# EAGLE board STM32-PROX (EAGLE 6.5.0), part 1 of 2
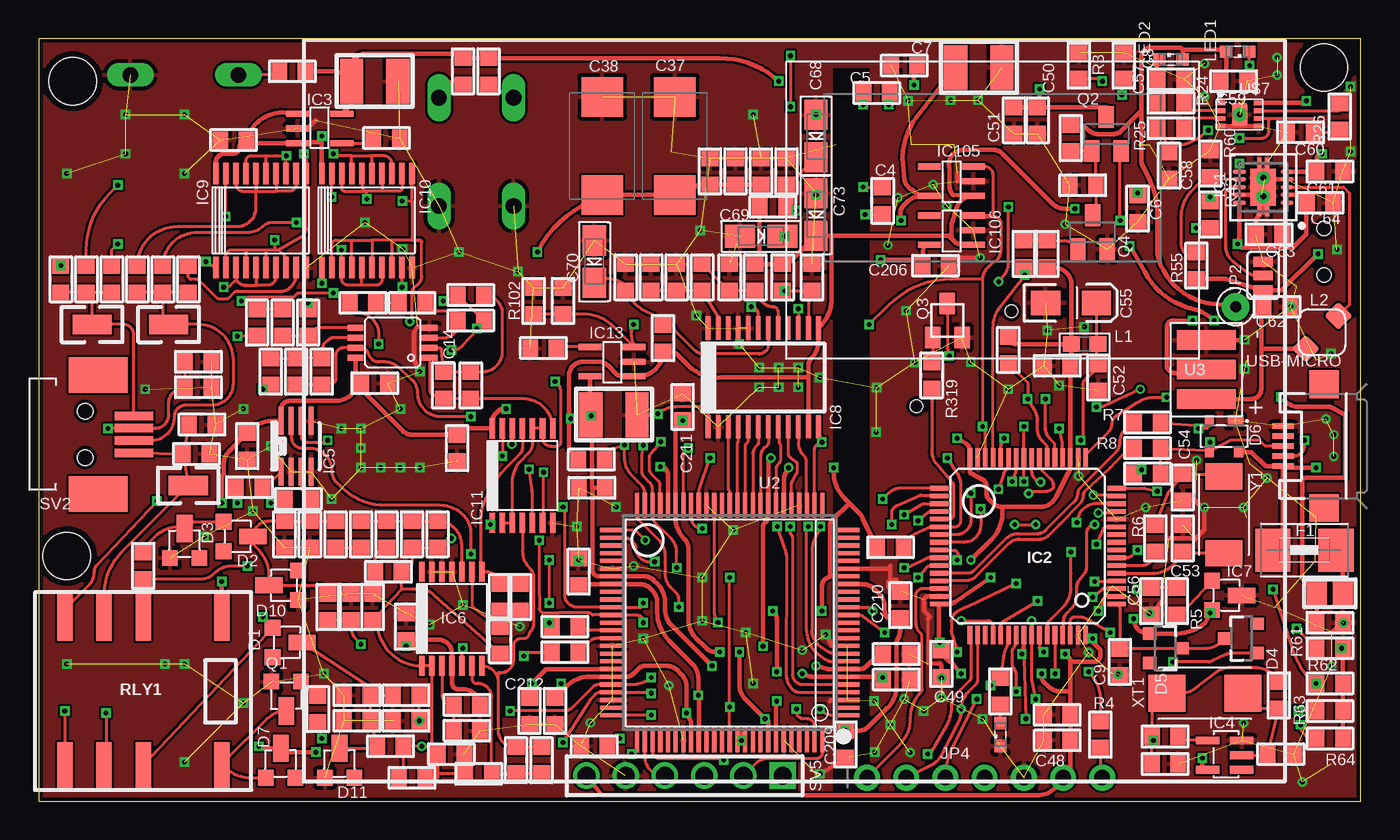
[diagram p0: board, top side]
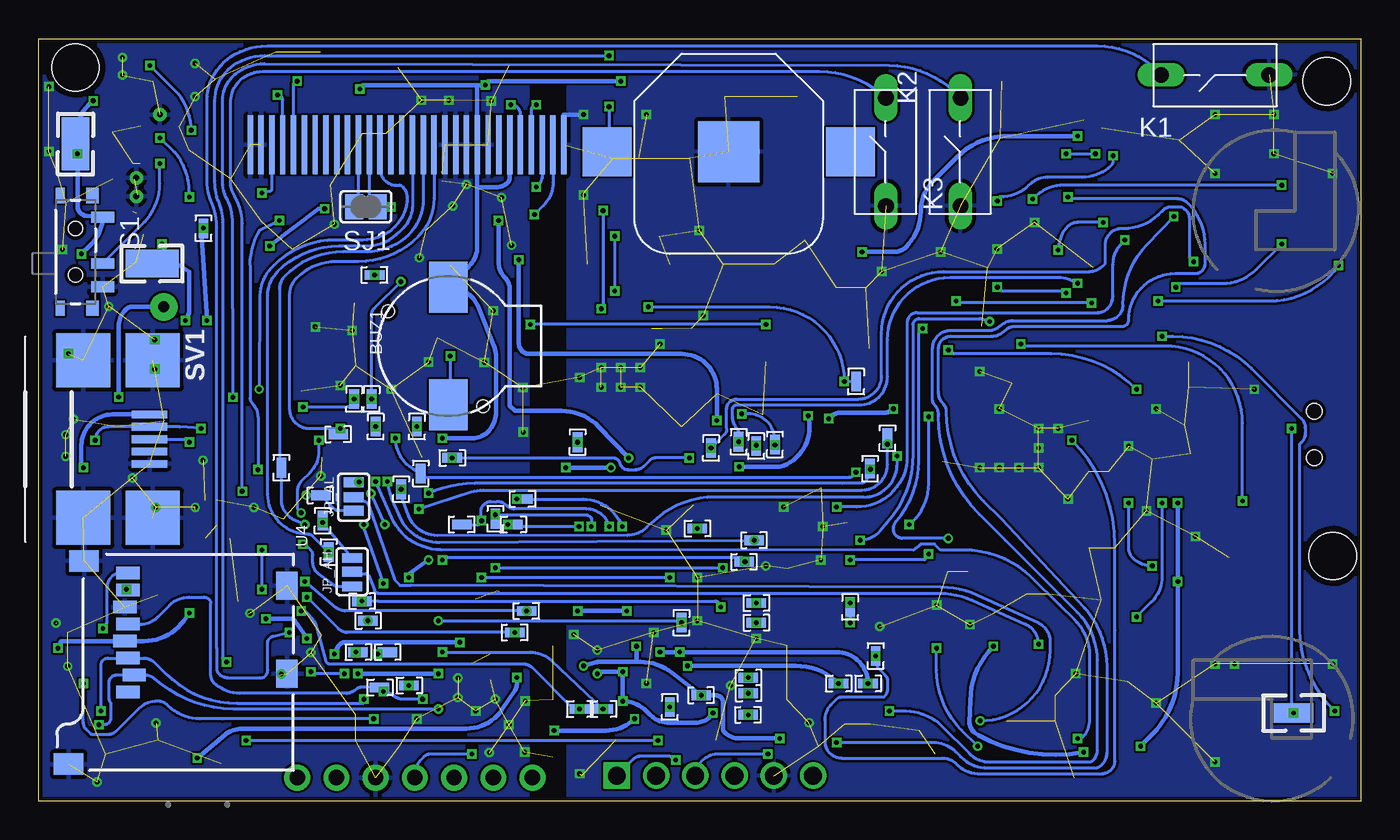
[diagram p1: board, bottom side, seen from below]

Size 85.62 x 49.37 mm. Coordinates in mm from the lower left corner, seen from the top.
Outline: 0,49.37 0,0 85.62,0 85.62,49.37 0,49.37
Copper layers (1*16): Top 0.035mm / dielectric 1.5mm / Bottom 0.035mm
Design rules "ITead_rule *": minimum track width 6mil, minimum drill 12mil, track to track 6mil, track to pad 6mil, pad to pad 6mil, via to via 6mil, smd to smd 0mil, copper to edge 10mil, drill to drill 10mil, minimum pad ring 10mil, minimum via ring 6mil, stop-mask expansion 2mil, vias tented up to drill 100mil, thermal gap 10mil
Net classes: 0 default: width 0.203 mm; 1 adc: width 0.203 mm; 2 power: width 0.279 mm, drill 0.254 mm

## Footprints (pad centres in the part's own frame; a part is rotated, then mirrored left to right if it is on the bottom)
SMD-TESTPOINT = smd 1.27 x 0.635: 1 0,0
NSL_SPARKFUN_BATTCON_12MM = smd 3.962 x 3.962: GND 0,0 | smd 3.175 x 3.175: PWR@1 -7.874,0; PWR@2 7.874,0
BUZZER = smd 3.3 x 2.5: 1 3.81,0; 2 -3.81,0 | hole 0.8: -3.897,-2.25; 2.25,3.897
RLC_0603 = smd 1 x 1.1: 1 -0.85,0; 2 0.85,0
RLC_1210 = smd 1.5 x 2.9: 1 -1.5,0; 2 1.5,0
D/7343-31R = smd 2.55 x 2.7: + 3.175,0; - -3.175,0
EIA3216-KIT = smd 1.9 x 1.6: A 1.65,0; C -1.65,0
EIA3216-18/A-R = smd 1.95 x 1.5: + 1.375,0; - -1.375,0
SOT23-3LEAD = smd 1.016 x 1.016: 1 -0.94,-0.762; 2 0.965,-0.762 | smd 1.016 x 1.778: 3 0.013,1.143
SOT23-3 = smd 0.8 x 0.9: 1 -0.95,-1; 2 0.95,-1; 3 0,1.1
USBUG_SOT143B = smd 1 x 0.7: 1 -0.75,-1 | smd 0.6 x 0.7: 2 0.95,-1; 3 0.95,1; 4 -0.95,1
1812 = smd 2.286 x 2.794: 1 -2.046,0; 2 2.046,0
RLC_0603@1 = smd 1 x 1.1: 1 -0.85,0; 2 0.85,0
QFN-10 = smd 0.28 x 0.85: 1 -1,-1.545; 2 -0.5,-1.545; 3 0,-1.545; 4 0.5,-1.545; 5 1,-1.545; 6 1,1.545; 7 0.5,1.545; 8 0,1.545; 9 -0.5,1.545; 10 -1,1.545 | smd 2.4 x 1.65: P0 0,0 | smd 0.7 x 0.28: P1 -1.55,-0.25; P2 1.55,-0.25; P3 1.55,0.25; P4 -1.55,0.25 | drill 0.381: V0 -0.6,0; V1 0.6,0
LQFP64A_PACKAGE = smd 1.2 x 0.3: 1 -5.75,3.75; 2 -5.75,3.25; 3 -5.75,2.75; 4 -5.75,2.25; 5 -5.75,1.75; 6 -5.75,1.25; 7 -5.75,0.75; 8 -5.75,0.25; 9 -5.75,-0.25; 10 -5.75,-0.75; 11 -5.75,-1.25; 12 -5.75,-1.75; 13 -5.75,-2.25; 14 -5.75,-2.75; 15 -5.75,-3.25; 16 -5.75,-3.75; 33 5.75,-3.75; 34 5.75,-3.25; 35 5.75,-2.75; 36 5.75,-2.25; 37 5.75,-1.75; 38 5.75,-1.25; 39 5.75,-0.75; 40 5.75,-0.25; 41 5.75,0.25; 42 5.75,0.75; 43 5.75,1.25; 44 5.75,1.75; 45 5.75,2.25; 46 5.75,2.75; 47 5.75,3.25; 48 5.75,3.75 | smd 0.3 x 1.2: 17 -3.75,-5.75; 18 -3.25,-5.75; 19 -2.75,-5.75; 20 -2.25,-5.75; 21 -1.75,-5.75; 22 -1.25,-5.75; 23 -0.75,-5.75; 24 -0.25,-5.75; 25 0.25,-5.75; 26 0.75,-5.75; 27 1.25,-5.75; 28 1.75,-5.75; 29 2.25,-5.75; 30 2.75,-5.75; 31 3.25,-5.75; 32 3.75,-5.75; 49 3.75,5.75; 50 3.25,5.75; 51 2.75,5.75; 52 2.25,5.75; 53 1.75,5.75; 54 1.25,5.75; 55 0.75,5.75; 56 0.25,5.75; 57 -0.25,5.75; 58 -0.75,5.75; 59 -1.25,5.75; 60 -1.75,5.75; 61 -2.25,5.75; 62 -2.75,5.75; 63 -3.25,5.75; 64 -3.75,5.75
SOT-23-5 = smd 0.4 x 1.5: 1 -0.94,-1.422; 2 0.01,-1.422; 3 0.96,-1.422; 4 0.96,1.428; 5 -0.94,1.428
SMV-5 = smd 1.5 x 0.5: 1 0,0; 2 0,-0.95; 3 0,-1.9; 4 2.2,-1.9; 5 2.2,0
SOT-23-8-OR-MSOP-8 = smd 0.325 x 1.8: 1 -0.975,-1.65; 2 -0.325,-1.65; 3 0.325,-1.65; 4 0.975,-1.65; 5 0.975,1.65; 6 0.325,1.65; 7 -0.325,1.65; 8 -0.975,1.65
TSSOP-14 = smd 1.3 x 0.36: 1 0,0; 2 0,-0.65; 3 0,-1.3; 4 0,-1.95; 5 0,-2.6; 6 0,-3.25; 7 0,-3.9; 8 6.095,-3.9; 9 6.095,-3.25; 10 6.095,-2.6; 11 6.095,-1.95; 12 6.095,-1.3; 13 6.095,-0.65; 14 6.095,0
TSSOP-24 = smd 0.3 x 1.5: 1 -2.925,-3.2; 2 -2.275,-3.2; 3 -1.625,-3.2; 4 -0.975,-3.2; 5 -0.325,-3.2; 6 0.325,-3.2; 7 0.975,-3.2; 8 1.625,-3.2; 9 2.275,-3.2; 10 2.925,-3.2; 11 3.575,-3.2; 12 4.225,-3.2; 13 4.225,3.2; 14 3.575,3.2; 15 2.925,3.2; 16 2.275,3.2; 17 1.625,3.2; 18 0.975,3.2; 19 0.325,3.2; 20 -0.325,3.2; 21 -0.975,3.2; 22 -1.625,3.2; 23 -2.275,3.2; 24 -2.925,3.2
TSSOP-20 = smd 1.4 x 0.36: 1 0,0; 2 0,-0.65; 3 0,-1.3; 4 0,-1.95; 5 0,-2.6; 6 0,-3.25; 7 0,-3.9; 8 0,-4.55; 9 0,-5.2; 10 0,-5.85; 11 6.095,-5.85; 12 6.095,-5.2; 13 6.095,-4.55; 14 6.095,-3.9; 15 6.095,-3.25; 16 6.095,-2.6; 17 6.095,-1.95; 18 6.095,-1.3; 19 6.095,-0.65; 20 6.095,0
MSOP8 = smd 0.41 x 1.02: 1 0,0; 2 0.65,0; 3 1.3,0; 4 1.95,0; 5 1.95,4.8; 6 1.3,4.8; 7 0.65,4.8; 8 0,4.8
SJ_3 = smd 0.635 x 1.27: 1 -0.889,0; 2 0,0; 3 0.965,0
1X07_ROUND = drill 1 pad 1.676: 1 -7.62,0; 2 -5.08,0; 3 -2.54,0; 4 0,0; 5 2.54,0; 6 5.08,0; 7 7.62,0
B3F-5XX = drill 1.016 long: 1 -3.501,-0.029; 2 3.501,-0.029
0603 = smd 1.1 x 1: 1 -0.85,0; 2 0.85,0
CDRH2D18 = smd 1.3 x 1.3 rotated 225: P$1 -1.061,1.061 | smd 1.3 x 1.3 rotated 315: P$2 1.061,-1.061
LED_SML0603 = smd 0.8 x 0.8: A 0.75,0; C -0.75,0
SOT23-BEC = smd 1 x 1.4: B -0.95,-1.1; C 0,1.1; E 0.95,-1.1
SOT-23-3 = smd 1 x 1.4: 1 -0.95,-1.1; 2 0.95,-1.1; 3 0,1.1
G6S-2F = smd 1 x 3: 1 -5.08,-4.78; 3 0,-4.78; 4 2.54,-4.78; 5 5.08,-4.78; 8 5.08,4.78; 9 2.54,4.78; 10 0,4.78; 12 -5.08,4.78
SWITCH-SPST-SMD-A = smd 0.7 x 1.5: 1 -2.25,-1.75; 2 -0.75,-1.75; 3 2.25,-1.75 | smd 1 x 0.6: GND1 -3.65,1; GND3 3.65,1 | smd 1 x 0.8: GND2 -3.65,-1.1; GND4 3.65,-1.1 | hole 0.9: -1.5,0; 1.5,0
SOLDERJUMPER_REFLOW = smd 1.168 x 1.6: 1 -0.762,0; 2 0.762,0
USB-MINIB-SMD = smd 2.3 x 0.5: 1 2,0.4; 2 2,-0.4; 3 2,-1.2; 4 2,-2; 5 2,-2.8 | smd 3.5 x 3.5: TAB0 -2.3,3.9; TAB1 2.2,3.9; TAB2 2.2,-6.3; TAB3 -2.3,-6.3
HIROSE-MQ172-4POS = smd 0.55 x 2.5: 1 -1.2,6.75; 2 -0.4,6.75; 3 0.4,6.75; 4 1.2,6.75 | smd 2.3 x 3.8: P$1 -3.85,4.45; P$2 3.85,4.45 | hole 1: -1.5,3.6; 1.5,3.6
HEADER-MALE-6X1-0.100-UNKEYED = drill 1.143 square: 1 0,6.35 | drill 1.143: 2 0,3.81; 3 0,1.27; 4 0,-1.27; 5 0,-3.81; 6 0,-6.35
KEYSTONE-SMD-TESTPOINT-5015 = smd 2.54 x 1.27: 1 0,0
TESTPAD-PTH-0.7MM = drill 0.7 pad 1.778: 1 0,0
--MERGED_KEYSTONE-SMD-TESTPOINT-5015 = smd 3.429 x 1.778: 1 0,0
RLC_0805 = smd 1.3 x 1.5: 1 -0.85,0; 2 0.85,0
VQ100 = smd 0.27 x 1.6: 1 -6,-7.6; 2 -5.5,-7.6; 3 -5,-7.6; 4 -4.5,-7.6; 5 -4,-7.6; 6 -3.5,-7.6; 7 -3,-7.6; 8 -2.5,-7.6; 9 -2,-7.6; 10 -1.5,-7.6; 11 -1,-7.6; 12 -0.5,-7.6; 13 0,-7.6; 14 0.5,-7.6; 15 1,-7.6; 16 1.5,-7.6; 17 2,-7.6; 18 2.5,-7.6; 19 3,-7.6; 20 3.5,-7.6; 21 4,-7.6; 22 4.5,-7.6; 23 5,-7.6; 24 5.5,-7.6; 25 6,-7.6; 51 6,7.6; 52 5.5,7.6; 53 5,7.6; 54 4.5,7.6; 55 4,7.6; 56 3.5,7.6; 57 3,7.6; 58 2.5,7.6; 59 2,7.6; 60 1.5,7.6; 61 1,7.6; 62 0.5,7.6; 63 0,7.6; 64 -0.5,7.6; 65 -1,7.6; 66 -1.5,7.6; 67 -2,7.6; 68 -2.5,7.6; 69 -3,7.6; 70 -3.5,7.6; 71 -4,7.6; 72 -4.5,7.6; 73 -5,7.6; 74 -5.5,7.6; 75 -6,7.6 | smd 1.6 x 0.27: 26 7.6,-6; 27 7.6,-5.5; 28 7.6,-5; 29 7.6,-4.5; 30 7.6,-4; 31 7.6,-3.5; 32 7.6,-3; 33 7.6,-2.5; 34 7.6,-2; 35 7.6,-1.5; 36 7.6,-1; 37 7.6,-0.5; 38 7.6,0; 39 7.6,0.5; 40 7.6,1; 41 7.6,1.5; 42 7.6,2; 43 7.6,2.5; 44 7.6,3; 45 7.6,3.5; 46 7.6,4; 47 7.6,4.5; 48 7.6,5; 49 7.6,5.5; 50 7.6,6; 76 -7.6,6; 77 -7.6,5.5; 78 -7.6,5; 79 -7.6,4.5; 80 -7.6,4; 81 -7.6,3.5; 82 -7.6,3; 83 -7.6,2.5; 84 -7.6,2; 85 -7.6,1.5; 86 -7.6,1; 87 -7.6,0.5; 88 -7.6,0; 89 -7.6,-0.5; 90 -7.6,-1; 91 -7.6,-1.5; 92 -7.6,-2; 93 -7.6,-2.5; 94 -7.6,-3; 95 -7.6,-3.5; 96 -7.6,-4; 97 -7.6,-4.5; 98 -7.6,-5; 99 -7.6,-5.5; 100 -7.6,-6
MICROBUILDER_UG-2864HSWEG01_0.96IN_WRAPAROUND = smd 0.35 x 3.81 bottom: 1 -10.15,8.96; 2 -9.45,8.96; 3 -8.75,8.96; 4 -8.05,8.96; 5 -7.35,8.96; 6 -6.65,8.96; 7 -5.95,8.96; 8 -5.25,8.96; 9 -4.55,8.96; 10 -3.85,8.96; 11 -3.15,8.96; 12 -2.45,8.96; 13 -1.75,8.96; 14 -1.05,8.96; 15 -0.35,8.96; 16 0.35,8.96; 17 1.05,8.96; 18 1.75,8.96; 19 2.45,8.96; 20 3.15,8.96; 21 3.85,8.96; 22 4.55,8.96; 23 5.25,8.96; 24 5.95,8.96; 25 6.65,8.96; 26 7.35,8.96; 27 8.05,8.96; 28 8.75,8.96; 29 9.45,8.96; 30 10.15,8.96
MICRO-SD-SOCKET-PP = smd 0.8 x 1.5: 1 -8.94,10.7; 2 -7.84,10.3; 3 -6.74,10.7; 4 -5.64,10.9; 5 -4.54,10.7; 6 -3.44,10.9; 7 -2.34,10.7; 8 -1.24,10.7 | smd 1.8 x 1.4: CD1 -2.05,0.4; CD2 -7.75,0.4 | smd 1.4 x 1.9: GND1 -13.6,14.55; GND3 -0.45,13.55
STAND-OFF-TIGHT = hole 3.048: 0,0
UDFN-EP = smd 0.3 x 0.65: 1 -0.75,-1.25; 2 -0.25,-1.25; 3 0.25,-1.25; 4 0.75,-1.25; 5 0.75,1.25; 6 0.25,1.25; 7 -0.25,1.25; 8 -0.75,1.25 | smd 1.45 x 1.05: 9 0,0 | drill 0.356: V1 0,0
BATT = smd 1.27 x 3.81: 1 -1.905,0; 2 0,0; 3 1.905,0
USB-MICROB = smd 0.35 x 1.4: D+ 0,2.65; D- -0.65,2.65; GND 1.3,2.65; ID 0.65,2.65; VBUS -1.3,2.65 | smd 1.8 x 1.9: MT1 -4,0; MT2 4,0
XTAL-SMD-CITIZEN-CS10 = smd 2.4 x 2.4: A -0.2,0; B 4.7,0
CRYSTAL-TXC-7A = smd 1.7 x 2.4: P$1 2.485,0; P$2 -2.485,0

## Placement (x,y rotation side)
ADC_CLK_TP  TESTPAD  [SMD-TESTPOINT]  50.72,23.24 90 bottom
ADC_NOE_TP  TESTPAD  [SMD-TESTPOINT]  37.95,23.1 90 bottom
BAT1  3V  [NSL_SPARKFUN_BATTCON_12MM]  40.94,42.04 0 bottom
BUZ1  BUZZER  [BUZZER]  59.1,29.46 90 bottom
C1  33nF  [RLC_0603]  83.61,11.56 0 top
C2  22pF  [RLC_0603]  80.44,3.05 0 top
C3  22pF  [RLC_0603]  72.94,2.41 0 top
C4  1uF  [RLC_0603]  54.66,38.86 90 top
C5  1uF  [RLC_0603]  54.28,45.85 0 top
C6  4.7uF  [RLC_0603]  71.17,38.35 270 top
C7  4.7uF  [RLC_0603]  56.05,47.62 180 top
C8  4.7uF  [RLC_0603]  70.28,47.62 90 top
C9  100nF  [RLC_0603]  70.02,9.02 90 top
C10  100nF  [RLC_0603]  26.72,3.05 0 top
C11  1nF  [RLC_0603]  20.62,6.86 180 top
C12  1nF  [RLC_0603]  22.78,3.56 0 top
C13  dnp  [RLC_0603]  32.56,2.67 90 top
C14  22pF  [RLC_0603]  6.78,15.24 90 top
C15  130pF  [RLC_0603]  15.92,17.27 270 top
C16  1nF  [RLC_0603]  20.88,17.27 90 top
C17  dnp  [RLC_0603]  31.16,13.21 90 top
C18  33nF  [RLC_0603]  41.32,33.91 90 top
C19  33nF  [RLC_0603]  44.75,33.91 90 top
C20  dnp  [RLC_0603]  10.33,28.45 0 top
C21  33nF  [RLC_0603]  23.8,11.3 90 top
C22  33nF  [RLC_0603]  21.76,27.05 0 top
C23  33nF  [RLC_0603]  13.51,22.99 270 top
C24  33nF  [RLC_0603]  27.1,22.86 270 top
C25  33nF  [RLC_0603]  65.96,5.59 180 top
C26  33nF  [RLC_0603]  65.96,28.19 180 top
C27  4.7uF  [RLC_1210]  21.76,46.61 0 top
C28  33nF  [RLC_0603]  33.45,5.84 270 top
C29  33nF  [RLC_0603]  34.97,14.86 90 top
C30  33nF  [RLC_0603]  35.99,3.56 180 top
C31  33nF  [RLC_0603]  55.55,9.53 0 top
C32  33nF  [RLC_0603]  55.55,7.87 0 top
C33  4.7uF  [RLC_1210]  60.88,47.5 0 top
C34  4.7uF  [RLC_1210]  37.26,25.02 0 top
C35  47pF  [RLC_0603]  10.59,24.38 0 top
C36  dnp  [RLC_0603]  10.21,22.48 0 top
C37  100uF  [D/7343-31R]  41.19,42.42 270 top
C38  100uF  [D/7343-31R]  36.5,42.42 270 top
C39  1nF  [RLC_0603]  10.33,26.8 0 top
C40  dnp  [RLC_0603]  27.99,26.92 270 top
C41  dnp  [RLC_0603]  18.34,27.81 270 top
C42  1nF  [RLC_0603]  21,32.26 0 top
C43  1nF  [RLC_0603]  14.14,30.99 90 top
C44  33nF  [RLC_0603]  45.13,40.77 90 top
C45  100nF  [RLC_0603]  21.64,12.57 90 top
C46  33nF  [RLC_0603]  12.62,42.8 180 top
C47  33nF  [RLC_0603]  35.82,20.3 180 top
C48  100nF  [RLC_0603]  65.96,3.94 180 top
C49  100nF  [RLC_0603]  58.47,8.89 270 top
C50  100nF  [RLC_0603]  64.69,44.07 270 top
C51  100nF  [RLC_0603]  63.17,44.07 270 top
C52  100nF  [RLC_0603]  68.63,27.43 270 top
C53  12pF  [RLC_0603]  74.09,17.02 270 top
C54  12pF  [RLC_0603]  74.09,20.32 90 top
C55  10uF  [EIA3216-KIT]  66.85,32.26 0 top
C56  100nF  [RLC_0603]  72.06,12.95 270 top
C57  100nF  [RLC_0603]  73.33,46.74 0 top
C58  100nF  [RLC_0603]  73.2,41.15 270 top
C59  1uF  [RLC_0603]  77.39,46.61 0 top
C60  100nF  [RLC_0603]  81.71,43.31 180 top
C61  1uF  [RLC_0603]  83.61,40.77 0 top
C62  10uF  [RLC_0603]  80.18,32 0 top
C63  100nF  [RLC_0603]  79.68,36.7 180 top
C64  10uF  [RLC_0603]  82.98,38.73 0 top
C65  100nF  [RLC_0603]  38.02,33.91 90 top
C66  100nF  [RLC_0603]  48.43,40.77 90 top
C67  100nF  [RLC_0603]  50.08,33.91 90 top
C68  4.7uF  [EIA3216-18/A-R]  50.34,43.05 270 top
C69  4.7uF  [EIA3216-18/A-R]  46.78,36.58 0 top
C70  4.7uF  [EIA3216-18/A-R]  35.99,34.92 270 top
C71  100nF  [RLC_0603]  43.48,40.77 90 top
C72  100nF  [RLC_0603]  46.78,40.77 90 top
C73  4.7uF  [EIA3216-18/A-R]  50.34,37.97 270 top
C74  10nF  [RLC_0603]  22.53,42.93 0 top
C75  10nF  [RLC_0603]  32.69,29.34 180 top
C206  4.7uF  [RLC_0603]  58.09,34.67 0 top
C209  100nF  [RLC_0603]  52.24,3.68 270 top
C210  100nF  [RLC_0603]  55.8,12.7 90 top
C211  100nF  [RLC_0603]  41.7,25.53 90 top
C212  100nF  [RLC_0603]  31.8,5.84 270 top
CROSS_HI_TP  TESTPAD  [SMD-TESTPOINT]  31.42,9.4 90 bottom
CROSS_LO_TP  TESTPAD  [SMD-TESTPOINT]  33.07,12.57 270 bottom
D1  DIODE-SMD-SOT23  [SOT23-3LEAD]  15.92,10.29 270 top
D2  DIODE-SMD-SOT23  [SOT23-3LEAD]  12.75,17.14 270 top
D3  DIODE-SMD-SOT23  [SOT23-3LEAD]  9.45,16.51 0 top
D4  PMEG4005ET  [SOT23-3]  77.9,10.54 90 top
D5  PMEG4005ET  [SOT23-3]  72.94,9.91 270 top
D6  USBUG_PRTR5V0U2X  [USBUG_SOT143B]  76.75,23.62 180 top
D7  DIODE-SMD-SOT23  [SOT23-3LEAD]  15.67,2.29 0 top
D10  DIODE-SMD-SOT23  [SOT23-3LEAD]  16.05,13.97 90 top
D11  DIODE-SMD-SOT23  [SOT23-3LEAD]  19.48,2.29 0 top
DBG_TP  TESTPAD  [SMD-TESTPOINT]  39.67,5.59 180 bottom
F1  [1812]  81.96,16.26 180 top
FB1  FERRITERLC_0603  [RLC_0603@1]  40.43,29.97 270 top
FB2\  FERRITERLC_0603  [RLC_0603@1]  48.18,33.91 90 top
FB3  FERRITERLC_0603  [RLC_0603@1]  47.54,38.48 180 top
FPGA_DOUT_TP  TESTPAD  [SMD-TESTPOINT]  43.99,11.56 270 bottom
FPGA_NINIT_TP  TESTPAD  [SMD-TESTPOINT]  58.85,22.23 0 bottom
FPGA_NINIT_TP1  TESTPAD  [SMD-TESTPOINT]  31.78,21.53 90 bottom
FPGA_NINIT_TP2  TESTPAD  [SMD-TESTPOINT]  30.65,23.5 90 bottom
IC1  [QFN-10]  79.3,39.75 90 top
IC2  STM32F1_HIGH_DENSITY_LQFP64LQFP64(10X10)  [LQFP64A_PACKAGE]  64.05,16.51 180 top
IC3  PQ1X331M2ZP-3V3-LDO-SOT-23-5  [SOT-23-5]  18.21,43.56 270 top
IC4  HCU-INVERTER  [SMV-5]  77.9,2.03 180 top
IC5  TLV3502  [SOT-23-8-OR-MSOP-8]  16.68,22.99 0 top
IC6  MCP6294  [TSSOP-14]  24.81,8.76 90 top
IC7  MCP100  [SOT23-3LEAD]  76.75,13.34 270 top
IC8  TLC5540  [TSSOP-24]  46.27,27.43 0 top
IC9  74XX244  [TSSOP-20]  11.48,34.54 90 top
IC10  74XX244  [TSSOP-20]  18.34,34.54 90 top
IC11  CD4066  [TSSOP-14]  29.38,18.03 90 top
IC13  PQ1X331M2ZP-3V3-LDO-SOT-23-5  [SOT-23-5]  37.13,28.45 90 top
IC14  AD8052  [MSOP8]  25.32,28.7 90 top
IC105  MCP1824T-250  [SOT-23-5]  59.1,40.13 90 top
IC106  MCP1824T-120  [SOT-23-5]  59.1,36.96 90 top
JP2  JUMPER-3SMD  [SJ_3]  79.3,34.04 270 top
JP4  [1X07_ROUND]  61.26,1.52 0 top
JP_AH  [SJ_3]  65.33,14.86 270 bottom
JP_AL  [SJ_3]  65.22,19.68 90 bottom
K1  [B3F-5XX]  9.45,46.99 180 bottom
K2  [B3F-5XX]  25.96,42.04 90 bottom
K3  [B3F-5XX]  30.78,42.04 90 bottom
L1  100Ohm  [0603]  67.74,29.59 0 top
L2  CDRH2D18/HPNP-2R2NC  [CDRH2D18]  83.1,30.35 90 top
LED1  [LED_SML0603]  77.64,48.51 180 top
LED2  [LED_SML0603]  73.33,48.01 0 top
LED3  [LED_SML0603]  62.28,4.32 90 top
LED_A_TP  TESTPAD  [SMD-TESTPOINT]  61.64,7.49 0 bottom
MISO_TP  TESTPAD  [SMD-TESTPOINT]  54.02,12.32 180 bottom
MOSI_TP  TESTPAD  [SMD-TESTPOINT]  54.78,10.92 180 bottom
NCS_TP  TESTPAD  [SMD-TESTPOINT]  64.69,12.95 0 bottom
OE1_TP  TESTPAD  [SMD-TESTPOINT]  42.08,22.86 270 bottom
OE2_TP  TESTPAD  [SMD-TESTPOINT]  40.29,23.27 270 bottom
OE3_TP  TESTPAD  [SMD-TESTPOINT]  39.67,8 0 bottom
OE4_TP  TESTPAD  [SMD-TESTPOINT]  39.67,6.99 0 bottom
PCK0_TP  TESTPAD  [SMD-TESTPOINT]  44.75,6.1 270 bottom
PWR_HI_TP  TESTPAD  [SMD-TESTPOINT]  39.16,12.83 0 bottom
PWR_LO_TP  TESTPAD  [SMD-TESTPOINT]  39.16,11.56 0 bottom
Q1  NPN-SOT23-2N3904  [SOT23-3LEAD]  16.05,6.99 180 top
Q2  BC817-16SMD  [SOT23-BEC]  69.13,43.18 0 top
Q3  MMBT2222  [SOT-23-3]  58.85,31.11 0 top
Q4  BC817-16SMD  [SOT23-BEC]  68.25,36.83 0 top
R1  1M  [RLC_0603@1]  80.31,6.86 90 top
R2  100  [RLC_0603@1]  72.94,4.19 180 top
R3  820K  [RLC_0603@1]  67.36,47.62 270 top
R4  10K  [RLC_0603@1]  68.75,4.32 90 top
R5  10K  [RLC_0603@1]  73.71,12.95 90 top
R6  390  [RLC_0603@1]  72.31,17.02 270 top
R7  27  [RLC_0603@1]  71.8,24.51 180 top
R8  27  [RLC_0603@1]  71.8,22.86 180 top
R9  100K  [RLC_0603@1]  27.73,6.22 0 top
R10  100K  [RLC_0603@1]  27.73,4.57 180 top
R11  510K  [RLC_0603@1]  20.62,5.21 0 top
R12  100K  [RLC_0603@1]  24.18,1.52 180 top
R13  10K  [RLC_0603@1]  28.5,1.78 0 top
R14  10K  [RLC_0603@1]  30.91,2.67 90 top
R15  10K  [RLC_0603@1]  17.57,17.27 90 top
R16  zerohm  [RLC_0603@1]  19.22,17.27 270 top
R17  10K  [RLC_0603@1]  24.18,17.27 90 top
R18  10K  [RLC_0603@1]  29.89,13.21 90 top
R19  10K  [RLC_0603@1]  29.89,10.41 90 top
R20  240K  [RLC_0603@1]  13.64,20.32 0 top
R21  24K  [RLC_0603@1]  16.81,19.56 0 top
R22  33  [RLC_0603@1]  4.75,33.78 270 top
R23  1K  [RLC_0603@1]  33.96,32.38 270 top
R24  [RLC_0603@1]  73.33,45.21 0 top
R25  [RLC_0603@1]  73.33,43.56 0 top
R26  215.9K  [RLC_0603@1]  84.25,44.32 270 top
R27  33  [RLC_0603@1]  6.4,33.78 270 top
R28  33  [RLC_0603@1]  3.1,33.78 270 top
R29  33  [RLC_0603@1]  8.05,33.78 270 top
R30  10M  [RLC_0603@1]  23.8,6.86 0 top
R31  240K  [RLC_0603@1]  23.8,5.21 0 top
R32  zerohm  [RLC_0603@1]  15.8,30.99 270 top
R33  2.4K  [RLC_0603@1]  26.21,26.92 270 top
R34  10K  [RLC_0603@1]  16.68,27.81 270 top
R35  zerohm  [RLC_0603@1]  24.18,32.26 0 top
R36  dnp  [RLC_0603@1]  25.83,17.27 90 top
R37  dnp  [RLC_0603@1]  22.53,17.27 90 top
R38  dnp  [RLC_0603@1]  22.65,14.86 180 top
R39  1K  [RLC_0603@1]  34.08,11.3 0 top
R40  10K  [RLC_0603@1]  18.08,5.97 90 top
R41  10M  [RLC_0603@1]  18.72,12.57 270 top
R42  1M  [RLC_0603@1]  20.24,12.57 270 top
R43  74.74K  [RLC_0603@1]  75.87,37.97 90 top
R44  1K  [RLC_0603@1]  34.08,9.65 0 top
R45  10K  [RLC_0603@1]  9.7,33.78 270 top
R46  10K  [RLC_0603@1]  1.44,33.78 270 top
R47  10K  [RLC_0603@1]  35.8,22.12 0 top
R48  dnp  [RLC_0603@1]  17.45,30.99 270 top
R49  2.4K  [RLC_0603@1]  27.99,31.11 180 top
R50  10K  [RLC_0603@1]  15.03,27.81 90 top
R51  2.4K  [RLC_0603@1]  27.99,32.77 0 top
R52  100  [RLC_0603@1]  46.4,33.91 90 top
R53  330  [RLC_0603@1]  42.97,33.91 90 top
R54  100  [RLC_0603@1]  39.67,33.91 270 top
R55  1.5M  [RLC_0603@1]  74.98,34.67 270 top
R56  10K  [RLC_0603@1]  66.85,42.93 270 top
R57  10K  [RLC_0603@1]  65.33,35.43 90 top
R58  10K  [RLC_0603@1]  63.8,35.43 90 top
R59  3.3K  [RLC_0603@1]  55.16,16.43 180 top
R60  150K 1%  [RLC_0603@1]  75.87,41.27 270 top
R61  10K  [RLC_0603@1]  83.61,9.91 0 top
R62  10K  [RLC_0603@1]  83.61,7.62 0 top
R63  10K  [RLC_0603@1]  83.61,5.84 0 top
R64  10K  [RLC_0603@1]  83.61,4.06 0 top
R65  330  [RLC_0603@1]  62.28,7.11 270 top
R66  10K  [RLC_0603@1]  62.78,29.21 90 top
R67  10K  [RLC_0603@1]  67.61,39.88 0 top
R68  10K  [RLC_0603@1]  71.8,21.21 180 top
R69  10K  [RLC_0603@1]  29.13,47.24 90 top
R70  10K  [RLC_0603@1]  27.48,47.24 90 top
R71  10K  [RLC_0603@1]  16.43,47.24 0 top
R102  10K  [RLC_0603@1]  32.05,32.38 90 top
R319  100  [RLC_0603@1]  57.83,27.56 270 top
RELAY_ON_TP  TESTPAD  [SMD-TESTPOINT]  63.8,24.26 270 bottom
RLY1  G6S-2H  [G6S-2F]  6.78,7.11 180 top
S1  [SWITCH-SPST-SMD-A]  83.23,35.56 90 bottom
SJ1  [SOLDERJUMPER_REFLOW]  64.44,38.48 180 bottom
SPARE_FPGA_TP  TESTPAD  [SMD-TESTPOINT]  42.97,17.65 0 bottom
SPCK_TP  TESTPAD  [SMD-TESTPOINT]  50.59,5.97 0 bottom
SV1  USB-MINIB  [USB-MINIB-SMD]  80.44,24.64 0 bottom
SV2  HIROSE-MQ172-4POS  [HIROSE-MQ172-4POS]  -0.59,23.75 270 top
SV5  HEADER-MALE-6X1  [HEADER-MALE-6X1-0.100-UNKEYED]  41.83,1.65 270 top
TP1  TESTPAD  [SMD-TESTPOINT]  32.69,27.18 270 bottom
TP2  TESTPADKEYSTONE-SMD  [KEYSTONE-SMD-TESTPOINT-5015]  4.37,5.71 0 bottom
TP3  TESTPADKEYSTONE-SMD  [KEYSTONE-SMD-TESTPOINT-5015]  9.7,20.45 180 top
TP4  TESTPADKEYSTONE-SMD  [KEYSTONE-SMD-TESTPOINT-5015]  8.43,30.86 180 top
TP5  TESTPADKEYSTONE-SMD  [KEYSTONE-SMD-TESTPOINT-5015]  3.48,30.86 180 top
TP6  TESTPAD  [SMD-TESTPOINT]  63.55,7.37 0 bottom
TP8  TESTPAD0.7MM-ROUND-DRILLED  [TESTPAD-PTH-0.7MM]  77.52,32 180 top
TP9  TESTPADKEYSTONE-SMD  [--MERGED_KEYSTONE-SMD-TESTPOINT-5015]  83.23,42.55 90 bottom
TP10  TESTPADKEYSTONE-SMD  [--MERGED_KEYSTONE-SMD-TESTPOINT-5015]  78.28,34.8 180 bottom
TP11  TESTPAD  [SMD-TESTPOINT]  63.04,9.65 0 bottom
TP16  TESTPAD  [SMD-TESTPOINT]  74.95,37.08 90 bottom
TP18  TESTPAD  [SMD-TESTPOINT]  33.83,7.62 0 bottom
TP19  TESTPAD  [SMD-TESTPOINT]  42.72,6.86 180 bottom
TP20  TESTPAD  [SMD-TESTPOINT]  31.92,7.62 0 bottom
TP22  TESTPAD  [SMD-TESTPOINT]  61.13,24.26 270 bottom
TP23  TESTPAD  [SMD-TESTPOINT]  63.87,34.06 180 bottom
TP24  TESTPAD  [SMD-TESTPOINT]  49.07,5.97 0 bottom
TP25  TESTPAD  [SMD-TESTPOINT]  39.92,15.49 180 bottom
TP26  TESTPAD  [SMD-TESTPOINT]  39.16,23 270 bottom
TP28  TESTPAD  [SMD-TESTPOINT]  66.21,23.75 180 bottom
TP29  TESTPAD  [SMD-TESTPOINT]  69.9,21.59 90 bottom
TP30  TESTPAD  [SMD-TESTPOINT]  66.85,16.13 90 bottom
TP31  TESTPAD  [SMD-TESTPOINT]  64.94,9.65 0 bottom
TP32  TESTPAD  [SMD-TESTPOINT]  64.31,11.68 0 bottom
TP33  TESTPAD  [SMD-TESTPOINT]  60.88,21.21 90 bottom
TP34  TESTPAD  [SMD-TESTPOINT]  62.15,20.19 90 bottom
TP35  TESTPAD  [SMD-TESTPOINT]  39.29,16.89 180 bottom
TP48  TESTPAD  [SMD-TESTPOINT]  58.21,17.91 180 bottom
TP49  TESTPAD  [SMD-TESTPOINT]  56.05,18.29 90 bottom
TP50  TESTPAD  [SMD-TESTPOINT]  54.91,17.91 0 bottom
TP51  TESTPAD  [SMD-TESTPOINT]  54.28,19.56 180 bottom
TP52  TESTPAD  [SMD-TESTPOINT]  67.23,18.16 90 bottom
TP53  TESTPAD  [SMD-TESTPOINT]  67.36,19.81 180 bottom
TP54  TESTPAD  [SMD-TESTPOINT]  65.2,26.04 270 bottom
TP55  TESTPAD  [SMD-TESTPOINT]  64.05,26.04 270 bottom
U1  FERRITE0805  [RLC_0805]  83.61,13.46 180 top
U2  XC3S50  [VQ100]  44.75,11.56 90 top
U3  UG-2864HSWEG01  [MICROBUILDER_UG-2864HSWEG01_0.96IN_WRAPAROUND]  61.77,33.53 0 top
U4  SDCARD  [MICRO-SD-SOCKET-PP]  69.13,16 90 bottom
U$1  [STAND-OFF-TIGHT]  1.83,15.88 0 top
U$2  [STAND-OFF-TIGHT]  2.21,46.61 0 top
U$4  [STAND-OFF-TIGHT]  83.23,47.5 0 top
U$7  MC34674  [UDFN-EP]  77.77,44.45 270 top
U$9  BATT  [BATT]  75.61,27.94 270 top
U$12  [L1LOGO]  5.51,38.23 0 top
U$13  [L1LOGO]  5.76,5.33 270 top
USB-MICRO  USB-MICROB  [USB-MICROB]  83.23,22.99 90 top
XT1  XTAL-SMD-CITIZEN-CS10  [XTAL-SMD-CITIZEN-CS10]  77.77,6.99 180 top
Y1  8Mhz  [CRYSTAL-TXC-7A]  76.75,18.54 270 top

## Library data of the parts
ADC_CLK_TP ADC_NOE_TP C13 C17 C20 C36 C40 C41 CROSS_HI_TP CROSS_LO_TP D10 D11 DBG_TP L2 OE1_TP OE2_TP OE3_TP OE4_TP PCK0_TP PWR_HI_TP PWR_LO_TP R16 R24 R25 R32 R35-R38 R48 SPARE_FPGA_TP SV1 SV5 TP1-TP5 U3 U4 = STM32-PROX; OC_NEWARK: unknown; PARTNO: *
BAT1 = STM32-PROX; DIGIKEY: BK-885CT-ND; MPN: BK-885-TR; OC_NEWARK: unknown; PARTNO: BK-885-TR
BUZ1 = STM32-PROX; DIGIKEY: 102-1265-1-ND; MF: CCV-084B16; MPN: CCV-084B16; OC_NEWARK: unknown; PARTNO: CCV-084B16
C1 C18 C19 C21-C26 C28-C32 C44 C46 C47 C65-C67 C71 C72 C74 C75 = STM32-PROX; DIGIKEY: 311-1429-1-ND; MPN: CC0603KRX7R9BB333; OC_NEWARK: unknown; PARTNO: CC0603KRX7R9BB333
C2 C3 C14 = STM32-PROX; DIGIKEY: 445-1273-1-ND; MPN: C1608C0G1H220J080AA; OC_NEWARK: unknown; PARTNO: C1608C0G1H220J080AA
C4 C5 = STM32-PROX; DIGIKEY: 311-1358-1-ND; MPN: CC0805ZRY5V8BB105; OC_NEWARK: unknown; PARTNO: CC0805ZRY5V8BB105
C6-C8 = STM32-PROX; DIGIKEY: 1276-1065-1-ND; MPN: CL21A475KOFNNNE; OC_NEWARK: unknown; PARTNO: CL21A475KOFNNNE
C9 C48-C52 C56 = STM32-PROX; DIGIKEY: 1276-1007-1-ND; MPN: CL21F104ZBCNNNC; OC_NEWARK: unknown; PARTNO: CL21F104ZBCNNNC
C10 C45 C209-C212 = STM32-PROX; DIGIKEY: 1276-1005-1-ND; MPN: CL10B104KO8NNNC; OC_NEWARK: unknown; PARTNO: CL10B104KO8NNNC
C11 C12 C16 C39 C42 C43 = STM32-PROX; DIGIKEY: 490-1494-2-ND; MPN: GRM188R71H102KA01D; OC_NEWARK: unknown; PARTNO: GRM188R71H102KA01D
C15 = STM32-PROX; DIGIKEY: 490-1430-1-ND; MPN: GRM1885C1H131JA01D; OC_NEWARK: unknown; PARTNO: GRM1885C1H131JA01D
C27 C33 C34 = STM32-PROX; DIGIKEY: 1276-1856-1-ND; MPN: CL32B475KOINNNE; OC_NEWARK: unknown; PARTNO: CL32B475KOINNNE
C35 = STM32-PROX; DIGIKEY: 1276-1037-1-ND; MPN: CL10C470JB8NNNC; OC_NEWARK: unknown; PARTNO: CL10C470JB8NNNC
C37 C38 = STM32-PROX; DIGIKEY: 399-3769-1-ND; MPN: T491D107K010AT; OC_NEWARK: unknown; PARTNO: T491D107K010AT
C53 C54 = STM32-PROX; DIGIKEY: 1276-1120-1-ND; MPN: CL21C120JBANNNC; OC_NEWARK: unknown; PARTNO: CL21C120JBANNNC
C55 = STM32-PROX; DIGIKEY: 478-1656-1-ND; MF: TAJA106M006RNJ; MPN: TAJA106M006RNJ; OC_NEWARK: unknown; PARTNO: TAJA106M006RNJ
C57 C58 C60 C63 = STM32-PROX; DIGIKEY: 1276-1005-1-ND; MPN: CL10B104KO8NNNC; OC_NEWARK: 85K9474; PARTNO: CL10B104KO8NNNC
C59 C61 = STM32-PROX; DIGIKEY: 311-1372-1-ND; MPN: CC0603ZRY5V7BB105; OC_NEWARK: 06R5073; PARTNO: CC0603ZRY5V7BB105
C62 C64 = STM32-PROX; DIGIKEY: 445-9065-1-ND; DIGIKEY_ALT: 587-3238-1-ND; MPN: C1608X5R1C106M080AB; OC_NEWARK: unknown; PARTNO: C1608X5R1C106M080AB
C68-C70 C73 JP4 = microbuilder
C206 = STM32-PROX; DIGIKEY: 1276-1784-1-ND; MPN: EMK107ABJ475KA-T; OC_NEWARK: unknown; PARTNO: EMK107ABJ475KA-T
D1-D3 = STM32-PROX; DIGIKEY: BAS21INCT-ND; MF: BAS 21 E6327; MPN: BAS 21 E6327; OC_NEWARK: unknown; PARTNO: BAS 21 E6327
D4 D5 = STM32-PROX; DIGIKEY: 568-4134-1-ND; MPN: PMEG4005ET,215; OC_NEWARK: unknown; PARTNO: PMEG4005ET,215
D6 = badge.lbrbadge_2013
D7 = STM32-PROX; DIGIKEY: BZX84C47-FDICT-ND; OC_NEWARK: unknown; PARTNO: *
F1 = STM32-PROX; DIGIKEY: MICROSMD050FCT-ND; MPN: MICROSMD050F-2; OC_NEWARK: unknown; PARTNO: MICROSMD050F-2
FB1 FB2\ FB3 = STM32-PROX; DIGIKEY: 490-1057-6-ND; PARTNO: BLM31PG601SN1L
FPGA_DOUT_TP FPGA_NINIT_TP FPGA_NINIT_TP1 FPGA_NINIT_TP2 IC2 JP_AH JP_AL LED_A_TP MISO_TP MOSI_TP NCS_TP RELAY_ON_TP RLY1 SPCK_TP TP6 TP11 TP16 TP18-TP20 TP22-TP26 TP28-TP35 TP48-TP55 U$1 U$2 U$4 U$12 U$13 = STM32-PROX
IC1 = STM32-PROX; DIGIKEY: 296-21685-1-ND; MPN: TPS61202DRCT; OC_NEWARK: unknown; PARTNO: TPS61202DRCT
IC3 = STM32-PROX; DIGIKEY: 296-18476-1-ND; MPN: LP2985-33DBVR; OC_NEWARK: unknown; PARTNO: LP2985-33DBVR
IC4 = STM32-PROX; DIGIKEY: NC7SZ04M5XCT-ND; MF: NC7SZ04M5X; OC_NEWARK: unknown; PARTNO: *
IC5 = STM32-PROX; DIGIKEY: 296-18147-1-ND; MPN: TLV3502AIDCNT; OC_NEWARK: unknown; PARTNO: TLV3502AIDCNT
IC6 = STM32-PROX; DIGIKEY: MCP6294-E/ST-ND; MPN: MCP6294-E/ST; OC_NEWARK: unknown; PARTNO: MCP6294-E/ST
IC7 = STM32-PROX; DIGIKEY: MCP100T-270I/TTCT-ND; MPN: MCP100T-270I/TT; OC_NEWARK: unknown; PARTNO: MCP100T-270I/TT
IC8 = STM32-PROX; DIGIKEY: 296-2184-5-ND; MPN: TLC5540IPW; OC_NEWARK: unknown; PARTNO: TLC5540IPW
IC9 IC10 = STM32-PROX; DIGIKEY: 497-2913-1-ND; MF: 74AC244TTR; MPN: 74AC244TTR; OC_NEWARK: unknown; PARTNO: 74AC244TTR
IC11 = STM32-PROX; DIGIKEY: 296-14123-1-ND; MPN: CD4066BPWR; OC_NEWARK: unknown; PARTNO: CD4066BPWR
IC13 = STM32-PROX; DIGIKEY: 296-18476-2-ND; MPN: LP2985-33DBVR; OC_NEWARK: unknown; PARTNO: LP2985-33DBVR
IC14 = STM32-PROX; DIGIKEY: AD8052ARMZ-ND; MPN: AD8052ARMZ; OC_NEWARK: unknown; PARTNO: AD8052ARMZ
IC105 = STM32-PROX; DIGIKEY: MCP1824T-2502E/OTCT-ND; MPN: MCP1824T-2502E/OT; OC_NEWARK: unknown; PARTNO: MCP1824T-2502E/OT
IC106 = STM32-PROX; DIGIKEY: MCP1824T-1202E/OTCT-ND; MPN: MCP1824T-1202E/OT; OC_NEWARK: unknown; PARTNO: MCP1824T-1202E/OT
JP2 = SparkFun-Passives; MPN: NONE; OC_NEWARK: unknown; PARTNO: NONE
K1-K3 = STM32-PROX; DIGIKEY: CKN9102-ND; MF: PTS635SL50 LFS; MPN: PTS635SL50 LFS; OC_NEWARK: unknown; PARTNO: PTS635SL50 LFS
L1 SJ1 TP8-TP10 = STM32-PROX; MPN: NONE; OC_NEWARK: unknown; PARTNO: NONE
LED1 = STM32-PROX; DIGIKEY: 475-1409-1-ND; MF: LG Q971-KN-1; OC_NEWARK: unknown; PARTNO: *
LED2 = STM32-PROX; DIGIKEY: 475-3016-1-ND; MF: LS Q971-KN-1; OC_NEWARK: unknown; PARTNO: *
LED3 = STM32-PROX; DIGIKEY: 475-2558-1-ND; MF: LY Q976-P1S2-36; OC_NEWARK: unknown; PARTNO: *
Q1 = STM32-PROX; DIGIKEY: 568-1741-1-ND; MF: PMBT3904,215; MPN: PMBT3904,215; OC_NEWARK: unknown; PARTNO: PMBT3904,215
Q2 Q4 = transistor-npn
Q3 = STM32-PROX; MPN: MMBT2222A-7-F; OC_NEWARK: unknown; PARTNO: MMBT2222A-7-F
R1 R42 = STM32-PROX; DIGIKEY: 311-1.0MGRTR-ND; MPN: RC0603JR-071ML; OC_NEWARK: unknown; PARTNO: RC0603JR-071ML
R2 R52 R54 R319 = STM32-PROX; DIGIKEY: RMCF0603JT100RCT-ND; MPN: RMCF0603JT100R; OC_NEWARK: unknown; PARTNO: RMCF0603JT100R
R3 R66 = STM32-PROX; DIGIKEY: 311-820KGRTR-ND; MPN: RC0603JR-07820KL; OC_NEWARK: unknown; PARTNO: RC0603JR-07820KL
R4 R5 R13-R15 R17-R19 R34 R40 R45-R47 R50 R56-R58 R61-R64 R67-R71 R102 = STM32-PROX; DIGIKEY: RMCF0603JT10K0CT-ND; MPN: RMCF0603JT10K0; OC_NEWARK: unknown; PARTNO: RMCF0603JT10K0
R6 = STM32-PROX; DIGIKEY: RMCF0603JT390RCT-ND; MPN: RMCF0603JT390R; OC_NEWARK: unknown; PARTNO: RMCF0603JT390R
R7 R8 = STM32-PROX; DIGIKEY: RMCF0603JT27R0CT-ND; MPN: RMCF0603JT27R0; OC_NEWARK: unknown; PARTNO: RMCF0603JT27R0
R9 R10 R12 = STM32-PROX; DIGIKEY: 311-100KGRTR-ND; MPN: RC0603JR-07100KL; OC_NEWARK: unknown; PARTNO: RC0603JR-07100KL
R11 = STM32-PROX; DIGIKEY: P510KGTR-ND; MPN: ERJ-3GEYJ514V; OC_NEWARK: unknown; PARTNO: ERJ-3GEYJ514V
R20 R31 = STM32-PROX; DIGIKEY: 1276-5119-2-ND; MPN: RC1608J244CS; OC_NEWARK: unknown; PARTNO: RC1608J244CS
R21 = STM32-PROX; DIGIKEY: 311-24KGRTR-ND; MPN: RC0603JR-0724KL; OC_NEWARK: unknown; PARTNO: RC0603JR-0724KL
R22 R27-R29 = STM32-PROX; DIGIKEY: 311-33GRTR-ND; MPN: RC0603JR-0733RL; OC_NEWARK: unknown; PARTNO: RC0603JR-0733RL
R23 R39 R44 = STM32-PROX; DIGIKEY: RMCF0603JT1K00CT-ND; MPN: RMCF0603JT1K00; OC_NEWARK: unknown; PARTNO: RMCF0603JT1K00
R26 = STM32-PROX; DIGIKEY: 541-215KHCT-ND; MPN: CRCW0603215KFKEA; OC_NEWARK: unknown; PARTNO: CRCW0603215KFKEA
R30 R41 = STM32-PROX; DIGIKEY: 311-10MGRTR-ND; MPN: RC0603JR-0710ML; OC_NEWARK: unknown; PARTNO: RC0603JR-0710ML
R33 R49 R51 = STM32-PROX; DIGIKEY: 311-2.40KHRTR-ND; MPN: RC0603FR-072K4L; OC_NEWARK: unknown; PARTNO: RC0603FR-072K4L
R43 = STM32-PROX; DIGIKEY: RMCF0603JT75K0CT-ND; MPN: RMCF0603JT75K0; OC_NEWARK: unknown; PARTNO: RMCF0603JT75K0
R53 R65 = STM32-PROX; DIGIKEY: RMCF0603JT330RCT-ND; MPN: RMCF0603JT330R; OC_NEWARK: unknown; PARTNO: RMCF0603JT330R
R55 = STM32-PROX; DIGIKEY: RHM1.5MDCT-ND; MPN: ESR03EZPJ155; OC_NEWARK: unknown; PARTNO: ESR03EZPJ155; TOLERANCE: 5%
R59 = STM32-PROX; DIGIKEY: RMCF0603JT3K30CT-ND; MPN: RMCF0603JT3K30; OC_NEWARK: unknown; PARTNO: RMCF0603JT3K30
R60 = STM32-PROX; DIGIKEY: RHM150KADCT-ND; MPN: ESR03EZPF1503; OC_NEWARK: unknown; PARTNO: ESR03EZPF1503; TOLERANCE: 1%
S1 = SparkFun-Electromechanical; OC_NEWARK: unknown; PARTNO: *
SV2 = STM32-PROX; DIGIKEY: H10488CT-ND; MF: MQ172X-4PA(66); OC_NEWARK: unknown; PARTNO: *
U1 = STM32-PROX; DIGIKEY: 445-1566-1-ND; MF: MPZ2012S300A; MPN: MPZ2012S300A; OC_NEWARK: unknown; PARTNO: MPZ2012S300A
U2 = STM32-PROX; MPN: XC3S50-5VQ100C (not on bom); OC_NEWARK: unknown; PARTNO: XC3S50-5VQ100C (not on bom)
U$7 = STM32-PROX; DIGIKEY: MC34674AEPR2TR-ND; MF: MC34674AEPR2; MOUSER: 841-MC34674AEPR2; MPN: MC34674AEPR2; OC_NEWARK: unknown; PARTNO: MC34674AEPR2
U$9 = STM32-PROX; DIGIKEY: MC34674AEPR2TR-ND; MF: MC34674AEPR2; MPN: MC34674AEPR2; OC_NEWARK: unknown; PARTNO: MC34674AEPR2
USB-MICRO = STM32-PROX; DIGIKEY: A97800CT-ND; MF: 1981568-1; MPN: 1981568-1; OC_NEWARK: unknown; PARTNO: 1981568-1
XT1 = STM32-PROX; DIGIKEY: 535-9101-1-ND; MF: ABM3-13.560MHZ-B2-T; MPN: ABM3-13.560MHZ-B2-T; OC_NEWARK: unknown; PARTNO: ABM3-13.560MHZ-B2-T
Y1 = STM32-PROX; DIGIKEY: 887-1740-1-ND; MPN: 7A-8.000MAAE-T; OC_NEWARK: unknown; PARTDB: 7A-8.000MAAE-T; PARTNO: 7A-8.000MAAE-T

## Nets
1356_CRYSTAL: C3.1 R1.2 R2.2 U2.89 U2.90 XT1.B
!OLED_CS: IC2.20 TP28.1 U3.13
!RES: IC2.61 TP29.1 U3.14
!SD_CS/JTAG_TDI: IC2.50 JP4.2 R64.1 U4.2
+1V2 [power]: C206.1 C209.1 C210.1 C211.1 C212.1 IC106.5 TP20.1 U2.18 U2.45 U2.69 U2.93
+2V5 [power]: C29.1 C30.1 C31.1 C33.1 IC105.5 TP19.1 U2.7 U2.33 U2.58 U2.84
+3V3 [power]: BUZ1.1 C7.1 C25.1 C26.1 C27.1 C48.1 C49.1 C50.1 C51.1 D5.1 IC2.19 IC2.32 IC2.48 IC2.64 IC3.5 IC7.2 JP4.6 L1.1 Q2.C R57.1 R61.2 R62.2 R63.2 R64.2 R66.2 R69.2 R70.2 R71.2 SV5.6 U3.6 U3.9 U4.4
+3V3-FPGA [power]: C28.1 C32.1 C34.1 C47.1 IC4.5 IC13.5 R59.2 TP18.1 U2.6 U2.19 U2.31 U2.46 U2.57 U2.70 U2.83 U2.94
A_RLY_NC: C14.1 R21.1 RLY1.3
A_RLY_NO: C42.1 RLY1.5
ADC1 [adc]: IC8.3 U2.38
ADC2 [adc]: IC8.4 U2.37
ADC3 [adc]: IC8.5 U2.36
ADC4 [adc]: IC8.6 U2.35
ADC5 [adc]: IC8.7 U2.34
ADC6 [adc]: IC8.8 U2.32
ADC7 [adc]: IC8.9 U2.30
ADC8 [adc]: IC8.10 U2.28
ADC_CLK [adc]: ADC_CLK_TP.1 IC8.12 U2.27
ADC_IN: IC8.19 IC11.2 IC11.3 IC11.9 IC11.10 TP1.1
ADC_NOE: ADC_NOE_TP.1 IC8.1 R47.2 U2.49
ADCDR_HI: C17.2 IC6.8 IC11.11 R18.2
ADCDR_LO: C13.2 IC6.7 IC11.4 R14.2
AMPL_HI: JP_AH.2 R41.2 R42.2
AMPL_HI1: IC2.14 JP_AH.1 TP52.1
AMPL_LO: JP_AL.2 R30.2 R31.2
AMPL_LO1: IC2.15 JP_AL.1 TP53.1
ANT_HI: C35.1 C36.1 RLY1.4 SV2.4 TP3.1
ANT_LO: C20.1 C39.1 RLY1.9 SV2.2 TP2.1
B_RLY_NC: D1.1 R20.1 RLY1.10
B_RLY_NO: C43.1 RLY1.8
BOOT0: IC2.60 R4.2
BOOT0_: JP4.7 R4.1
CROSS_HI: CROSS_HI_TP.1 IC5.6 R44.1
CROSS_LO: CROSS_LO_TP.1 IC5.7 R39.1
D/C: IC2.59 TP30.1 U3.15
D_N: IC2.44 R7.2
D_P: IC2.45 R8.2
DB2: SJ1.2 U3.20
DBG: DBG_TP.1 U2.75
FPGA_CCLK: IC2.41 TP25.1 U2.52
FPGA_DIN: IC2.42 TP26.1 U2.48
FPGA_DONE: IC2.26 TP35.1 U2.51
FPGA_DOUT: FPGA_DOUT_TP.1 IC2.52 U2.40
FPGA_NINIT: FPGA_NINIT_TP.1 IC2.38 R59.1 U2.42
FPGA_NPROGRAM: IC2.23 TP24.1 U2.99
FPGA_ON: IC2.30 IC13.3 IC105.3 IC106.3 R23.2 R102.1 TP22.1
FPGA_TCK: SV5.4 U2.77
FPGA_TDI: SV5.2 U2.100
FPGA_TDO: SV5.3 U2.76
FPGA_TMS: SV5.1 U2.78
GND [power]: BAT1.GND C1.2 C2.2 C3.2 C6.2 C7.2 C8.2 C9.1 C10.2 C11.2 C15.2 C18.2 C19.2 C20.2 C21.2 C22.2 C23.2 C24.2 C25.2 C26.2 C27.2 C28.2 C29.2 C30.2 C31.2 C32.2 C33.2 C34.2 C35.2 C36.2 C37.- C38.- C39.2 C44.2 C45.2 C46.2 C47.2 C48.2 C49.2 C50.2 C51.2 C52.2 C53.1 C54.1 C55.C C56.2 C57.2 C58.2 C59.2 C60.2 C61.2 C62.2 C63.2 C64.2 C65.2 C66.2 C67.2 C68.- C69.- C70.- C71.2 C72.2 C73.- C74.2 C75.2 C206.2 C209.2 C210.2 C211.2 C212.2 D3.1 D6.1 D10.1 D11.1 IC1.4 IC1.9 IC1.P0 IC1.P1 IC1.P2 IC1.P3 IC1.P4 IC1.V0 IC1.V1 IC2.12 IC2.18 IC2.31 IC2.47 IC2.63 IC3.2 IC4.3 IC5.2 IC5.4 IC5.5 IC6.11 IC6.12 IC6.13 IC7.3 IC8.2 IC8.20 IC8.21 IC8.24 IC9.10 IC10.10 IC11.7 IC13.2 IC14.4 IC105.2 IC106.2 JP2.1 JP4.5 K1.1 K2.1 K3.1 LED3.C Q1.2 Q3.2 Q4.E R3.1 R10.1 R11.1 R15.1 R23.1 R31.1 R42.1 R54.1 R60.1 R67.1 R102.2 S1.1 SV1.5 SV1.TAB0 SV1.TAB1 SV1.TAB2 SV1.TAB3 SV5.5 U2.3 U2.10 U2.20 U2.29 U2.41 U2.56 U2.66 U2.73 U2.82 U2.95 U3.1 U3.8 U3.10 U3.11 U3.12 U3.29 U3.30 U4.6 U4.CD1 U4.CD2 U4.GND1 U4.GND3 U$7.4 U$7.5 U$7.9 U$7.V1 U$9.1 USB-MICRO.GND
JTAG_TCK: IC2.49 JP4.4
JTAG_TMS: IC2.46 JP4.1
JTRST: IC2.58 TP31.1
LED3: LED3.A R65.2
LED_A: IC2.54 LED_A_TP.1 R65.1
MISO: IC2.4 MISO_TP.1 U2.15
MOSI: IC2.3 MOSI_TP.1 U2.14
MUXSEL_HIPKD: FPGA_NINIT_TP2.1 IC2.40 IC11.12
MUXSEL_HIRAW: IC2.28 IC11.6 TP33.1
MUXSEL_LOPKD: FPGA_NINIT_TP1.1 IC2.39 IC11.5
MUXSEL_LORAW: IC2.27 IC11.13 TP34.1
N$1: IC2.24 JP_AL.3
N$2: C53.2 IC2.5 Y1.P$1
N$3: IC4.4 R2.1
N$4: C2.1 IC4.2 R1.1 XT1.A
N$5: C4.1 U3.2
N$6: C57.1 LED2.C R24.1
N$7: IC2.11 JP_AH.3
N$8: R24.2 U$7.2
N$9: C4.2 U3.3
N$10: C5.1 U3.4
N$11: C5.2 U3.5
N$12 [power]: F1.1 U1.1
N$13: C8.1 U3.27
N$14: IC6.3 R9.1 R10.2
N$15: C17.1 IC6.9 R18.1 R19.2
N$16: C12.2 IC6.5 R12.2
N$17: C13.1 IC6.6 R13.2 R14.1
N$18: C16.1 R16.2
N$19: C11.1 C12.1 D1.3 D11.3 R11.2 R30.1
N$20: C14.2 D2.1 D3.3
N$21: C15.1 D2.3 D10.3 R15.2 R16.1 R41.1
N$22: C16.2 IC6.10 R17.2 R36.2 R37.2
N$23: IC5.1 R20.2
N$24: C18.1 IC8.23 R53.1 R54.2
N$25: C6.1 U3.28
N$26: IC5.3 R21.2
N$27: R39.2 U2.64
N$28: R3.2 U3.26
N$29: U2.87
N$30: C9.2 D4.3 D5.3 IC2.1
N$31: R27.2 R29.2 R45.2 SV2.3 TP4.1
N$32: R22.2 R28.2 R46.2 SV2.1 TP5.1
N$33: IC9.12 IC9.14 IC9.16 IC9.18 R27.1
N$34: IC10.12 IC10.14 IC10.16 IC10.18 R28.1
N$35: D7.1 Q1.3 RLY1.12
N$36: C67.1 C69.+ FB2\.1 IC8.14
N$37: C66.1 C68.+ FB3.1 IC8.15
N$38: Q1.1 R40.2
N$39: C65.1 C70.+ FB1.1 IC8.18
N$40: R44.2 U2.65
N$41: IC9.3 IC9.5 IC9.7 R22.1
N$42: IC10.3 IC10.5 IC10.7 R29.1
N$43: C41.2 IC11.1 IC14.7 R34.2
N$44: IC9.9 R45.1
N$45: IC10.9 R46.1
N$46: C74.1 IC3.4
N$47: IC14.3 R35.2 R49.2
N$48: C19.1 IC8.17 R52.1 R53.2
N$49: C75.1 IC13.4
N$50: C43.2 R32.1
N$51: C42.2 R35.1
N$52: C40.1 IC14.2 R33.1 R51.2
N$53: C41.1 IC14.6 R34.1 R50.2
N$54: IC14.5 R32.2 R48.2
N$55: C58.1 LED1.C R25.1
N$56: R37.1 R38.2
N$57: BAT1.PWR@1 D4.1
N$58: SPARE_FPGA_TP.1 U2.43
N$59: BUZ1.2 Q3.3
N$60: Q3.1 R319.1
N$61: IC2.6 R6.2
N$62: C54.2 R6.1 Y1.P$2
N$63: R25.2 U$7.3
N$64: R26.1 U$7.7
N$65: C60.1 R26.2 R43.2 U$7.6
N$66: C63.1 IC1.1
N$67: IC1.7 R55.1 R60.2
N$68: IC1.3 L2.P$2
N$69: IC7.1 R5.1
N$70: Q2.E R68.2
N$71: Q4.B R57.2 R58.2
N$72: Q2.B Q4.C R56.2 R67.2
NCS: IC2.53 NCS_TP.1 U2.50
NRST: C56.1 IC2.7 R5.2
NTC [power]: R43.1 TP16.1 U$9.2
ONOFF: IC1.6 S1.2
PCK0: IC2.43 PCK0_TP.1 U2.88
PS: IC1.8 JP2.2
PWR_HI: IC9.2 IC9.4 IC9.6 IC9.8 IC9.11 IC10.13 IC10.15 IC10.17 PWR_HI_TP.1 U2.61
PWR_LO: IC9.13 IC9.15 IC9.17 IC10.2 IC10.4 IC10.6 IC10.8 IC10.11 PWR_LO_TP.1 U2.62
PWR_OE1: IC9.1 OE1_TP.1 U2.44
PWR_OE2: IC10.1 OE2_TP.1 U2.47
PWR_OE3: IC9.19 OE3_TP.1 U2.71
PWR_OE4: IC10.19 OE4_TP.1 U2.72
RAW_HI: C40.2 IC11.8 IC14.1 R33.2
RELAY_ON: IC2.25 R40.1 RELAY_ON_TP.1
SCLK/DB0: IC2.21 TP54.1 U3.18
SD_MISO: IC2.56 R62.1 TP11.1 U4.7
SD_MOSI: IC2.57 R63.1 TP32.1 U4.3
SD_RSV: R61.1 U4.8
SD_SCK/TDO: IC2.55 JP4.3 TP6.1 U4.5
SDIN/DB1: IC2.22 R66.1 SJ1.1 TP55.1 U3.19
SPCK: IC2.2 SPCK_TP.1 U2.1
SPEAKER: IC2.37 R319.2
SSP_CLK: IC2.34 TP50.1 U2.9
SSP_MISO: IC2.35 TP49.1 U2.8
SSP_MOSI: IC2.36 TP48.1 U2.5
SSP_NSS: IC2.33 TP51.1 U2.4
SW_K1: IC2.62 K1.2 R71.1
SW_K2: IC2.17 K2.2 R70.1
SW_K3: IC2.16 K3.2 R69.1
USB_ON: IC2.29 R58.1 TP23.1
USBD_N: D6.2 R7.1 SV1.2 USB-MICRO.D-
USBD_P: D6.3 R8.1 R68.1 SV1.3 USB-MICRO.D+
VBAT+ [power]: C61.1 C62.1 IC1.5 JP2.3 L2.P$1 R55.2 S1.3 TP9.1 U$7.8 U$9.3
VBUS [power]: C1.1 C59.1 LED1.A LED2.A R56.1 TP8.1 U1.2 U$7.1
VBUS_IN [power]: D6.4 F1.2 SV1.1 USB-MICRO.VBUS
VDD [power]: C21.1 C22.1 C23.1 C24.1 C37.+ C38.+ C44.1 C46.1 C64.1 C71.1 C72.1 C73.+ D7.3 FB1.2 FB2\.2 FB3.2 IC1.2 IC1.10 IC3.1 IC3.3 IC5.8 IC6.4 IC8.11 IC8.13 IC9.20 IC10.20 IC11.14 IC13.1 IC14.8 IC105.1 IC106.1 R9.2 R47.1 R52.2 RLY1.1 TP10.1
VDDA: C52.1 C55.A IC2.13 L1.2
VMID: C10.1 C45.1 IC6.1 IC6.2 R12.1 R13.1 R17.1 R19.1 R36.1 R38.1 R48.1 R49.1 R50.1 R51.1